# Altium PCB PCB1.pcbdoc
Units mil, origin at the board's own origin, x right, y up, seen from the top; angles counter-clockwise.
Board outline 2915.75 x 1800 mil, 2 copper layers (Top Layer, Bottom Layer); 18 components, 8 nets, 56 pads, 0 vias.
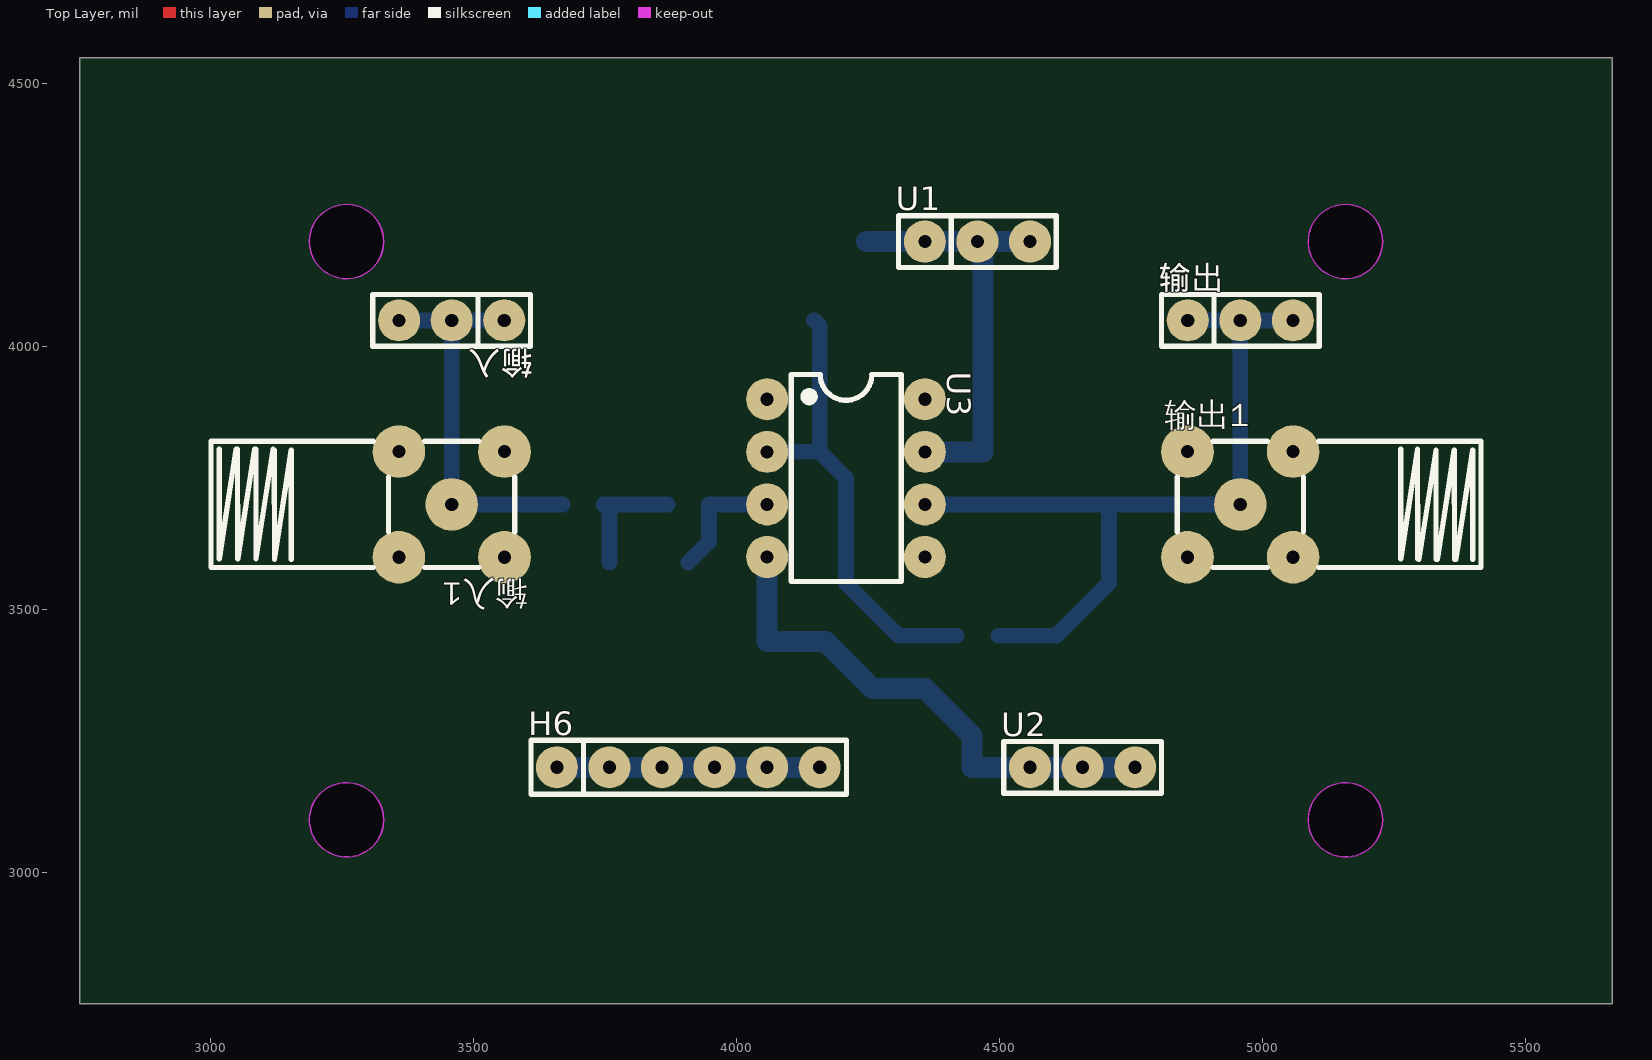
[diagram p0: Top Layer view]
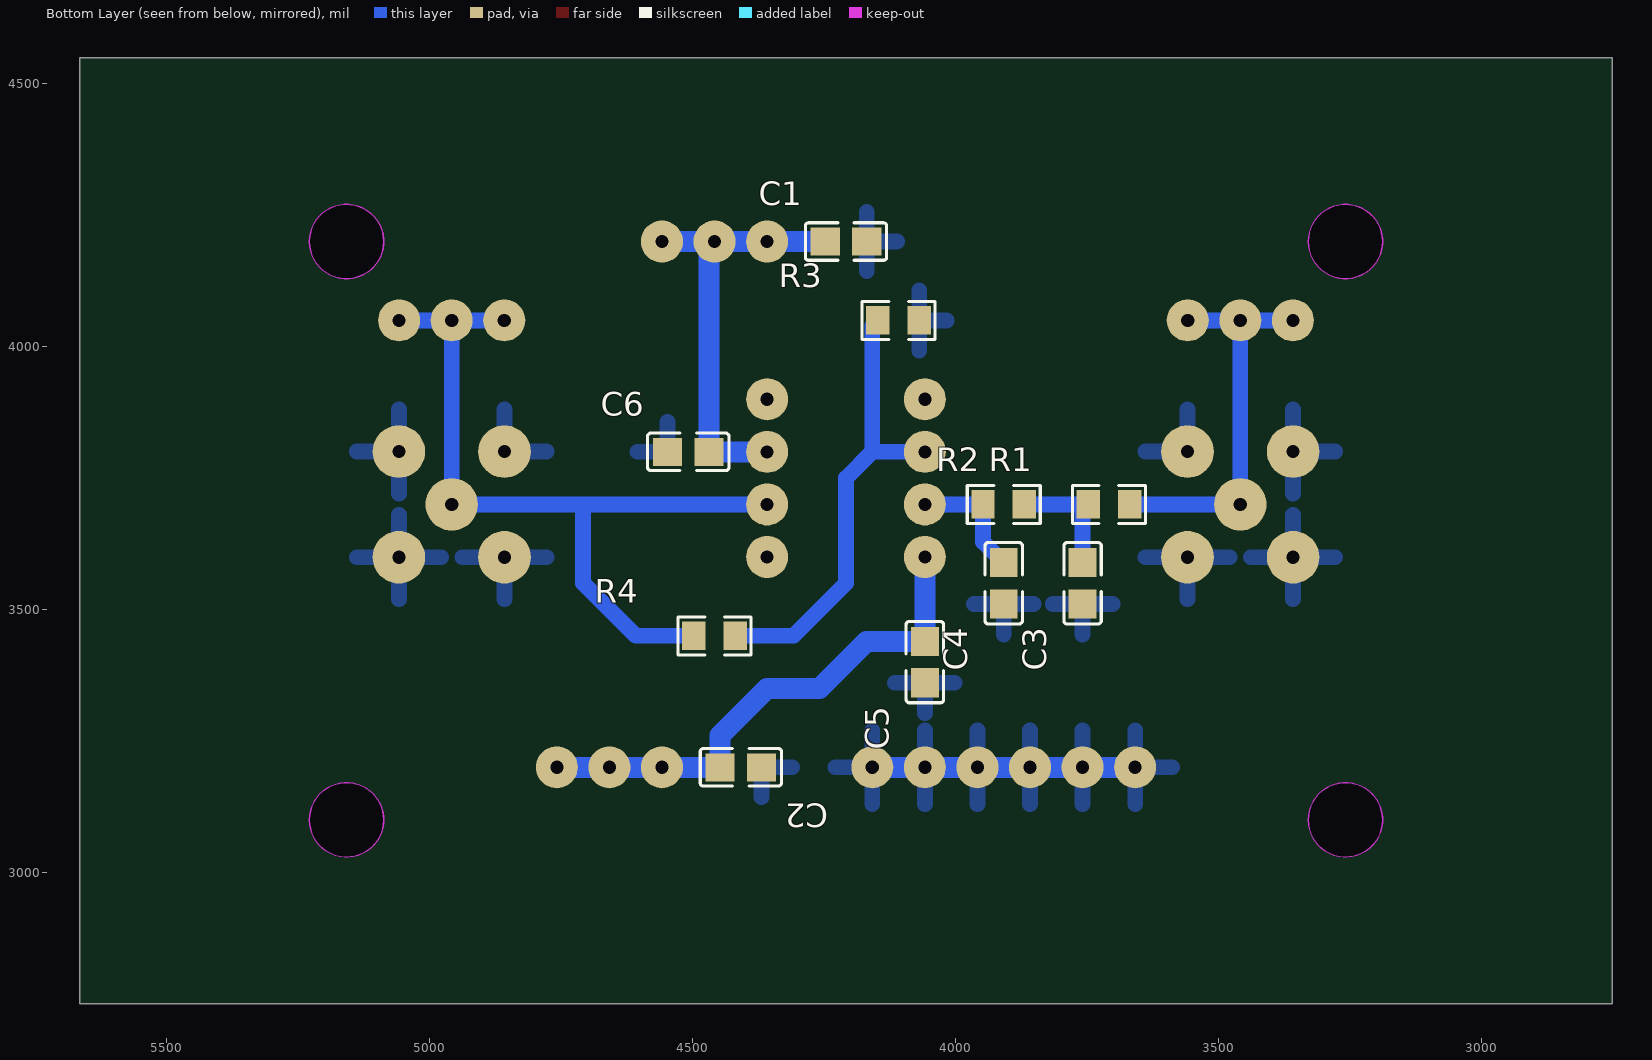
[diagram p1: Bottom Layer view, seen from below]

## Layer stack, top to bottom
Top Layer: signal copper (thickness not stored)
Dielectric: dielectric 12.6, FR-4, Dk 4.8
Bottom Layer: signal copper (thickness not stored)

## Board outline
5665.75,2750 2750,2750 2750,4550 5665.75,4550
cut-out: 3328.58,4200 cw(c3257.87,4200) 3187.16,4200 cw(c3257.87,4200)
cut-out: 3328.58,3100 cw(c3257.87,3100) 3187.16,3100 cw(c3257.87,3100)
cut-out: 5228.58,3100 cw(c5157.87,3100) 5087.16,3100 cw(c5157.87,3100)
cut-out: 5228.58,4200 cw(c5157.87,4200) 5087.16,4200 cw(c5157.87,4200)

## Design rules (kind name [scope] priority, off if disabled: settings)
BoardOutlineClearance copperThickness1oz [All] p0: genericclearance=10 ignorepadtopadclearanceinfootprint=FALSE except(0: Arc-SplitContinuation Track-SplitContinuation SMDPad-SplitContinuation THPad-SplitContinuation Via-SplitContinuation Fill-SplitContinuation Poly-SplitContinuation Region-SplitContinuation Text-SplitContinuation; 6: Track-CutoutEdge SMDPad-CutoutEdge THPad-CutoutEdge Via-CutoutEdge Region-CutoutEdge; 11.8: Track-OutlineEdge SMDPad-OutlineEdge THPad-OutlineEdge Via-OutlineEdge Fill-OutlineEdge Region-OutlineEdge Poly-OutlineEdge Text-OutlineEdge Fill-CutoutEdge)
BoardOutlineClearance copperThickness2oz [All] p0: genericclearance=10 ignorepadtopadclearanceinfootprint=FALSE except(0: Arc-SplitContinuation Track-SplitContinuation SMDPad-SplitContinuation THPad-SplitContinuation Via-SplitContinuation Fill-SplitContinuation Poly-SplitContinuation Region-SplitContinuation Text-SplitContinuation; 6: Track-CutoutEdge SMDPad-CutoutEdge THPad-CutoutEdge Via-CutoutEdge Region-CutoutEdge; 11.8: Track-OutlineEdge SMDPad-OutlineEdge THPad-OutlineEdge Via-OutlineEdge Fill-OutlineEdge Region-OutlineEdge Poly-OutlineEdge Text-OutlineEdge Fill-CutoutEdge)
Clearance copperThickness1oz [(InNet('GND') OR InNet('+12V') OR InNet('-12V') OR InNet('$1N1169') OR InNet('$1N1154') OR InNet('$1N781') OR InNet('$1N624') OR InNet('$1N628'))] p1: gap=7 ignorepadtopadclearanceinfootprint=FALSE except(4: Track-Track; 6: Track-SMDPad SMDPad-SMDPad Track-THPad SMDPad-THPad THPad-THPad Track-Via SMDPad-Via THPad-Via Via-Via SMDPad-Fill THPad-Fill Via-Fill Fill-Fill Track-Region SMDPad-Region THPad-Region Via-Region Region-Region Track-Poly SMDPad-Poly THPad-Poly Via-Poly Fill-Poly Region-Poly Poly-Poly Track-Text SMDPad-Text THPad-Text Via-Text Fill-Text Region-Text Poly-Text Text-Text; 6.9: Track-Hole SMDPad-Hole THPad-Hole Via-Hole Fill-Hole Region-Hole Poly-Hole Text-Hole Sheet-Hole; 11.8: Track-Fill Fill-Region Track-Sheet SMDPad-Sheet THPad-Sheet Via-Sheet Fill-Sheet Region-Sheet Poly-Sheet Text-Sheet)
Clearance copperThickness2oz [All] p1: gap=7 ignorepadtopadclearanceinfootprint=FALSE except(6: Track-SMDPad SMDPad-SMDPad Track-THPad SMDPad-THPad THPad-THPad Track-Via SMDPad-Via THPad-Via Via-Via SMDPad-Fill THPad-Fill Via-Fill Fill-Fill Track-Region SMDPad-Region THPad-Region Via-Region Region-Region Track-Poly SMDPad-Poly THPad-Poly Via-Poly Fill-Poly Region-Poly Poly-Poly Track-Text SMDPad-Text THPad-Text Via-Text Fill-Text Region-Text Poly-Text Text-Text; 6.9: Track-Hole SMDPad-Hole THPad-Hole Via-Hole Fill-Hole Region-Hole Poly-Hole Text-Hole Sheet-Hole; 8: Track-Track; 11.8: Track-Fill Fill-Region Track-Sheet SMDPad-Sheet THPad-Sheet Via-Sheet Fill-Sheet Region-Sheet Poly-Sheet Text-Sheet)
DiffPairsRouting differentialPair [All] p1: maxuncoupledlength=10 minlimit=6 maxlimit=6 mostfreqgap=6 toplayer_minwidth=5 toplayer_prefwidth=10 toplayer_maxwidth=100 bottomlayer_minwidth=5 bottomlayer_prefwidth=10 bottomlayer_maxwidth=100
PasteMaskExpansion pasteMaskExpansion [All] p1: expansion=0
PlaneConnect innerPlane [All] p1: planeconnectstyle=Relief reliefexpansion=20 reliefentries=4 reliefconductorwidth=10 reliefairgap=10
PolygonConnect copperRegion [All] p1: connectstyle=Relief reliefentries=4 reliefconductorwidth=10 polygonreliefangle="90 Angle" airgapwidth=10
PolygonConnect copperRegion1 [All] p1: connectstyle=Relief reliefentries=4 reliefconductorwidth=30 polygonreliefangle="90 Angle" airgapwidth=30
RoutingVias viaSize [All] p1: viastyle="Through Hole" holewidth=12.0078 minholewidth=11.811 maxholewidth=248.0314 width=24.0158 minwidth=19.685 maxwidth=393.7008
SolderMaskExpansion solderMaskExpansion [All] p1: useseparateexpansions=TRUE expansion=2 expansionbottom=2
Width copperThickness1oz [All] p1: maxlimit=100 minlimit=5 preferedwidth=10
Width copperThickness2oz [All] p1: maxlimit=100 minlimit=8 preferedwidth=10

## Components (designator, comment, footprint, x,y, rotation, side; value= is the part's Value field where it differs from the comment)
C1 "ERS1HM4R7D11OT" C0805 4207.87,4200 r180 bottom
C2 "ERS1HM4R7D11OT" C0805 4407.87,3200 r0 bottom
C3 "CAP_0603" C0805 3757.87,3550 r90 bottom
C4 "CAP_0603" C0805 3907.87,3550 r90 bottom
C5 "R08B1B102KN0B0S0N0" C0805 4057.87,3400 r90 bottom
C6 "R08B1B102KN0B0S0N0" C0805 4507.87,3800 r180 bottom
H6 "PZ254V-11-06P" HDR-TH_6P-P2.54-V-M 3907.87,3200 r0 top
R1 "MF1/4W-1K±1%-ST52" R0805 3707.87,3700 r180 bottom
R2 "MF1/4W-1K±1%-ST52" R0805 3907.87,3700 r180 bottom
R3 "MF1/4W-1K±1%-ST52" R0805 4107.87,4050 r180 bottom
R4 "MF1/4W-1K±1%-ST52" R0805 4457.87,3450 r180 bottom
U1 "PZ254V-11-03P" HDR-TH_3P-P2.54-V-M 4457.87,4200 r0 top
U2 "PZ254V-11-03P" HDR-TH_3P-P2.54-V-M 4657.87,3200 r0 top
U3 "OPA277N" PDIP-8_L9.6-W6.4-P2.54-LS7.6-BL 4207.87,3750 r270 top
输入 "PZ254V-11-03P" HDR-TH_3P-P2.54-V-M 3457.87,4050 r180 top
输入1 "BWSMA-KWE-Z001" SMA-TH_BWSMA-KWE-Z001 3457.87,3700 r180 top
输出 "PZ254V-11-03P" HDR-TH_3P-P2.54-V-M 4957.87,4050 r0 top
输出1 "BWSMA-KWE-Z001" SMA-TH_BWSMA-KWE-Z001 4957.87,3700 r0 top

## Footprints (in the part's own frame and the unit in brackets; to place one, negate y for a bottom-side part, rotate by r counter-clockwise, add the part's x,y. Pads: shape width x height; smd on the part's side, far side on the other; paste and mask are expansions set on the pad)
C0805 [mm]
  rect 1.41x1.35 smd: 1(-1,0) 2(1,0)
  silkscreen extent -1.96,-0.9 1.96,0.9
HDR-TH_3P-P2.54-V-M [mil]
  round 80 hole 25: 1(-100,0) 2(0,0) 3(100,0)
  silkscreen extent -150,-49 150,49
HDR-TH_6P-P2.54-V-M [mil]
  round 80 hole 25: 1(-250,0) 2(-150,0) 3(-50,0) 4(50,0) 5(150,0) 6(250,0)
  silkscreen extent -299,-51 301,51
PDIP-8_L9.6-W6.4-P2.54-LS7.6-BL [mil]
  round 80 hole 25: 1(-150,-150) 2(-50,-150) 3(50,-150) 4(150,-150) 5(150,150) 6(50,150) 7(-50,150) 8(-150,150)
  silkscreen extent -197,-104 197,105
R0805 [mm]
  rect 1.133x1.377 smd: 1(-1,0) 2(1,0)
  silkscreen extent -1.76,-0.92 1.76,0.92
SMA-TH_BWSMA-KWE-Z001 [mil]
  round 100 hole 25: 1(-100.4,-100.39) 2(-100.4,100.4) 3(100.39,100.4) 5(-0.01,0.01)
  round 100 hole 25 copper offset 0.01,-0.01: 4(100.39,-100.39)
  silkscreen extent -120,-120 458,120

## Nets (pads, with @x,y where several pads share a name; then routed paths per layer and width w, separated by ;. In a path a pad name is that pad's centre, name@x,y a point inside that pad or via, vN(x,y) a via of type N, cw(c..) or ccw(c..) an arc to the next point about the centre after c; other vN are vias at no path point)
$1N624: R3.1 R4.2 U3.2 | length 877.2
  Bottom Layer w30: U3.2 4157.87,3800 ; R3.1 4157.87,4039.37 4157.87,3800 ; R4.2 4307.87,3450 4207.87,3550 4207.87,3750 4157.87,3800
$1N628: R4.1 U3.6 输出1.5 输出.1 输出.2 输出.3 | length 1552
  Bottom Layer w30: U3.6 4707.87,3700 ; R4.1 4607.87,3450 4707.87,3550 4707.87,3700 ; 输出.1 输出.2 ; 输出.3 输出.2 ; 4707.87,3700 输出1.5 输出.2
$1N781: R1.2 输入1.5 输入.1 输入.2 输入.3 | length 760.6
  Bottom Layer w30: 输入.3 输入.2 ; 输入.1 输入.2 ; R1.2 输入1.5 输入.2
$1N1154: C4.2 R2.1 U3.3 | length 237.6
  Bottom Layer w30: C4.2 3947.24,3628.74 R2.1 U3.3
$1N1169: C3.2 R1.1 R2.2 | length 236.3
  Bottom Layer w30: C3.2 3757.87,3689.37 R1.1 R2.2
+12V: C1.1 C6.2 U1.1 U1.2 U1.3 U3.7 | length 800
  Bottom Layer w40: C1.1 U1.1 U1.2 U1.3 ; U3.7 C6.2 U1.2@4468.5,4178.74
-12V: C2.2 C5.2 U2.1 U2.2 U2.3 U3.4 | length 995.3
  Bottom Layer w40: U3.4 C5.2 4168.5,3439.37 4257.87,3350 4357.87,3350 4447.24,3260.63 C2.2 U2.1 U2.2 U2.3
GND: C1.2 C2.1 C3.1 C4.1 C5.1 C6.1 H6.1 H6.2 H6.3 H6.4 H6.5 H6.6 R3.2 输入1.1 输入1.2 输入1.3 输入1.4 输出1.1 输出1.2 输出1.3 输出1.4 | length 500
  Bottom Layer w40: H6.1 H6.2 H6.3 H6.4 H6.5 H6.6
pads on no net: U3.1 U3.5 U3.8

## Polygon pours and split planes (outlines as drawn)
GND on Bottom Layer (solid, remove dead copper, pour order 0): 3157.87,4300 5257.87,4300 5257.87,3000 3157.87,3000

## Keep-outs
Board Outline Layer:
  circle w1: c3257.87,4200 r70.71
  region: 3328.58,4200 cw(c3257.87,4200) 3187.16,4200 cw(c3257.87,4200)
  circle w1: c3257.87,3100 r70.71
  region: 3328.58,3100 cw(c3257.87,3100) 3187.16,3100 cw(c3257.87,3100)
  circle w1: c5157.87,3100 r70.71
  region: 5228.58,3100 cw(c5157.87,3100) 5087.16,3100 cw(c5157.87,3100)
  circle w1: c5157.87,4200 r70.71
  region: 5228.58,4200 cw(c5157.87,4200) 5087.16,4200 cw(c5157.87,4200)

## Silkscreen, mask and mechanical layers (free items; w line width, h text height)
Mechanical Layer:
  circle w1: c3257.87,4200 r70.71
  circle w1: c3257.87,3100 r70.71
  circle w1: c5157.87,3100 r70.71
  circle w1: c5157.87,4200 r70.71